# Altium PCB Rev4_FE_Test.PCBDOC (part 1 of 2)
Units mm, origin at the board's own origin, x right, y up, seen from the top; angles counter-clockwise.
Board outline 99.7 x 23.5 mm, 6 copper layers (Top Layer, Int1 (GND), Int2 (Sign), Int3 (Sign), Int4 (GND), Bottom Layer), stack 1.49 mm thick; 159 components, 78 nets, 449 pads, 301 vias.
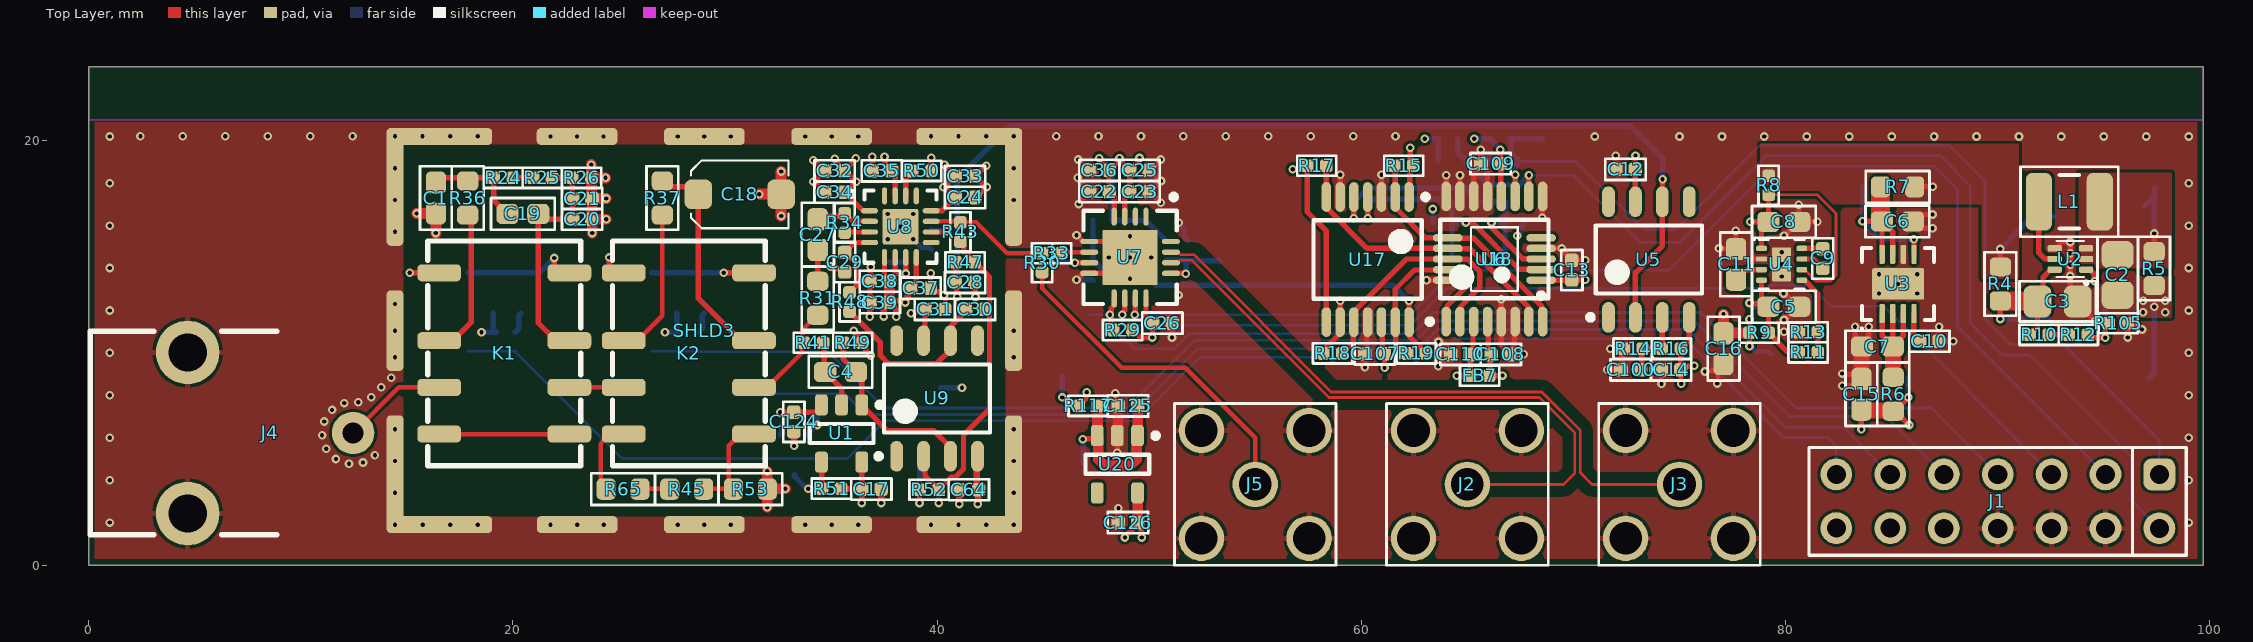
[diagram p0: Top Layer view]
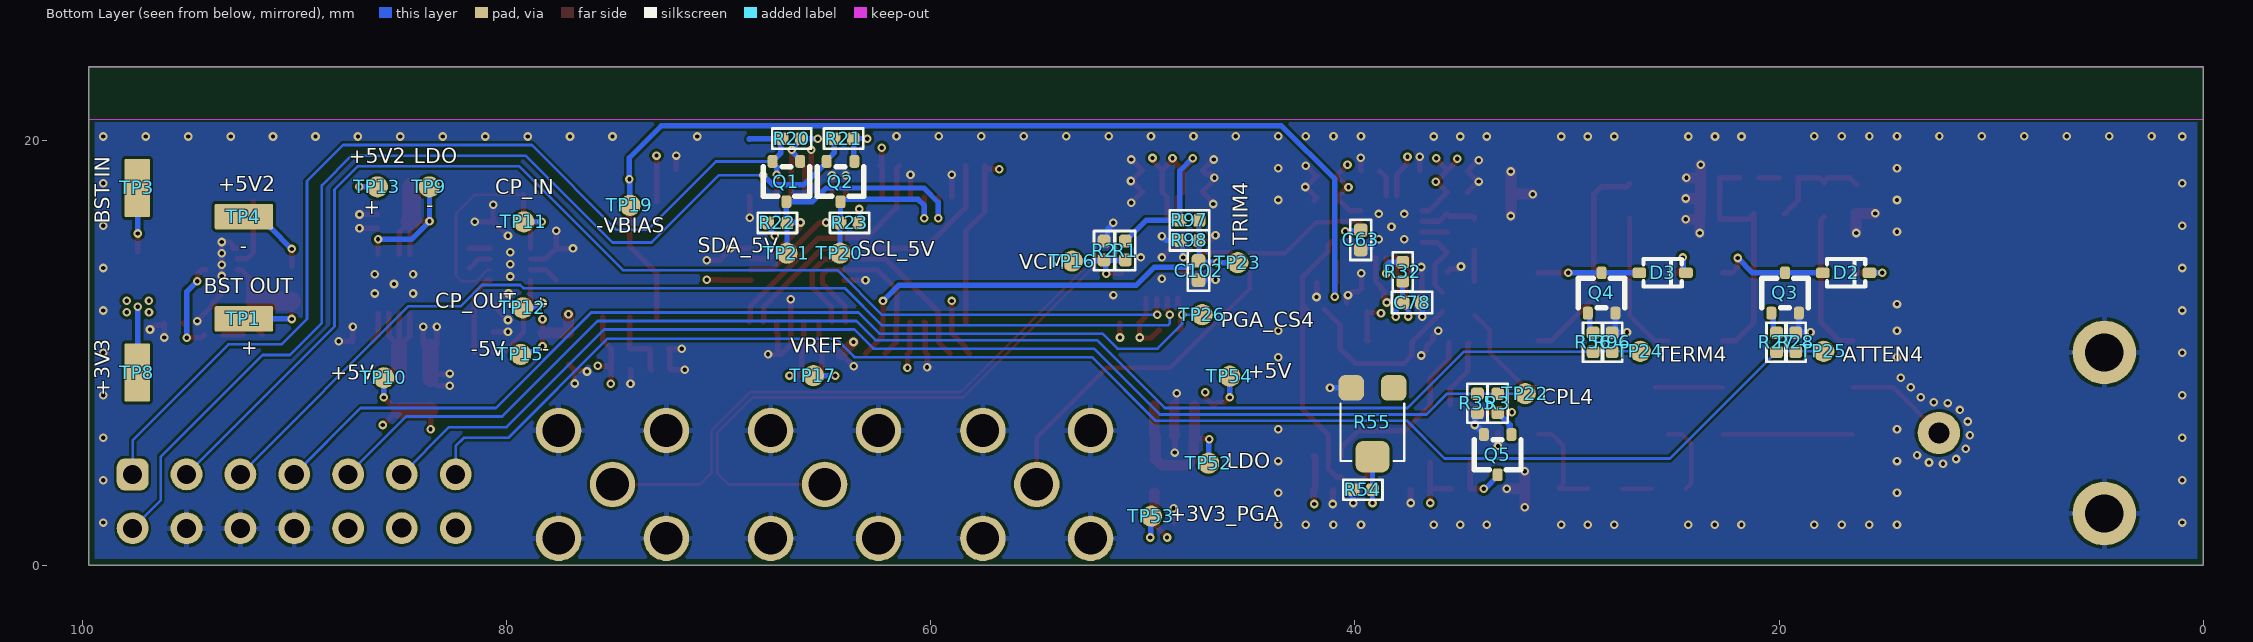
[diagram p1: Bottom Layer view, seen from below]
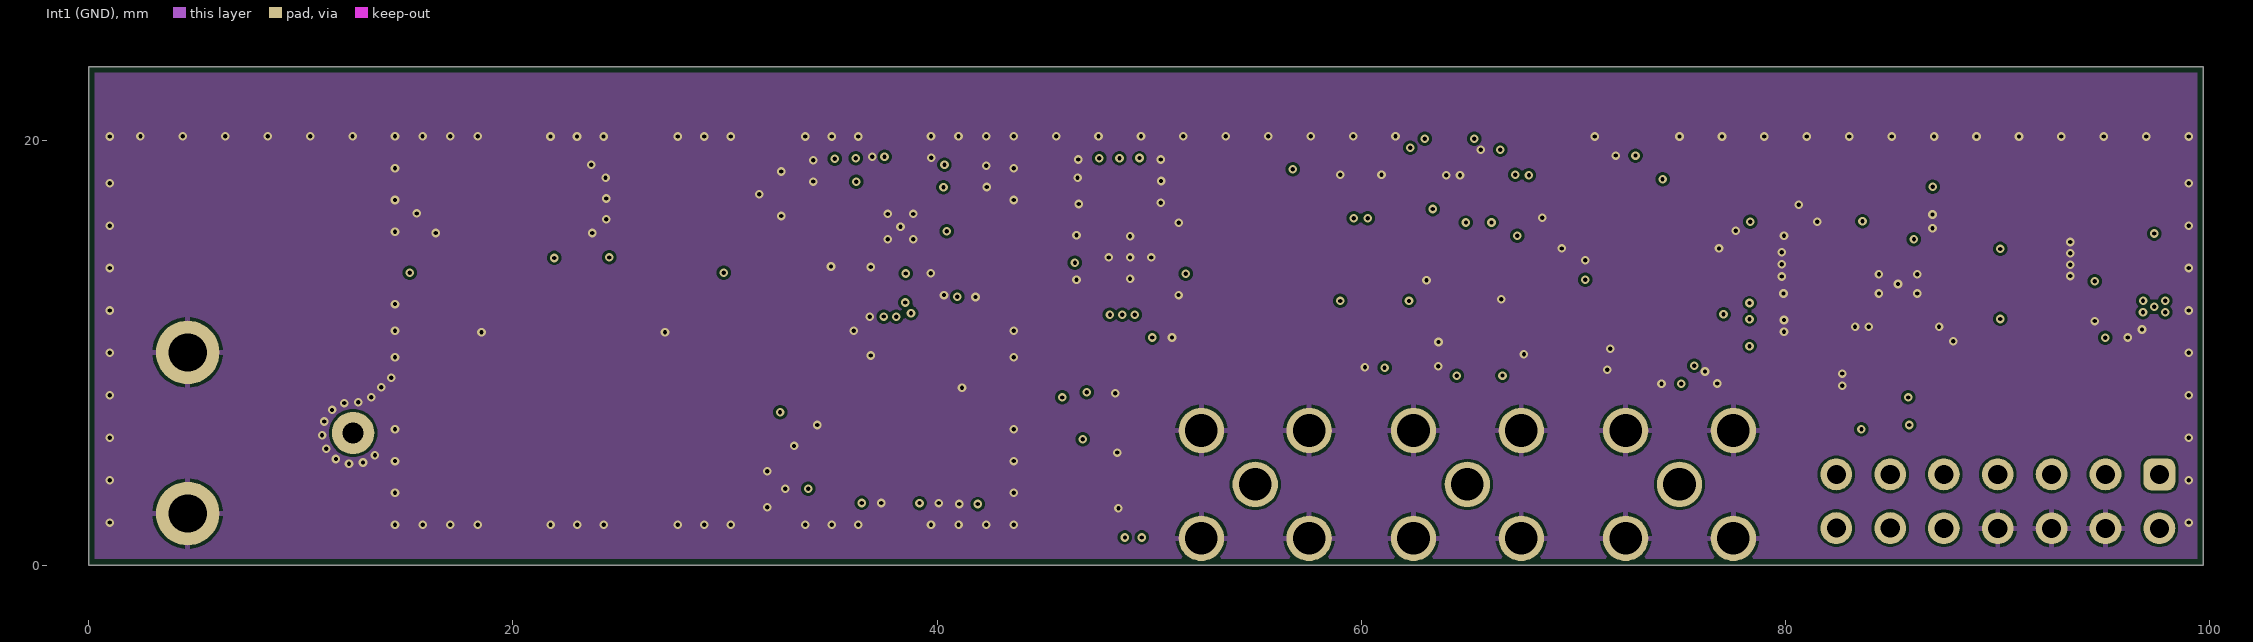
[diagram p2: Int1 (GND)]
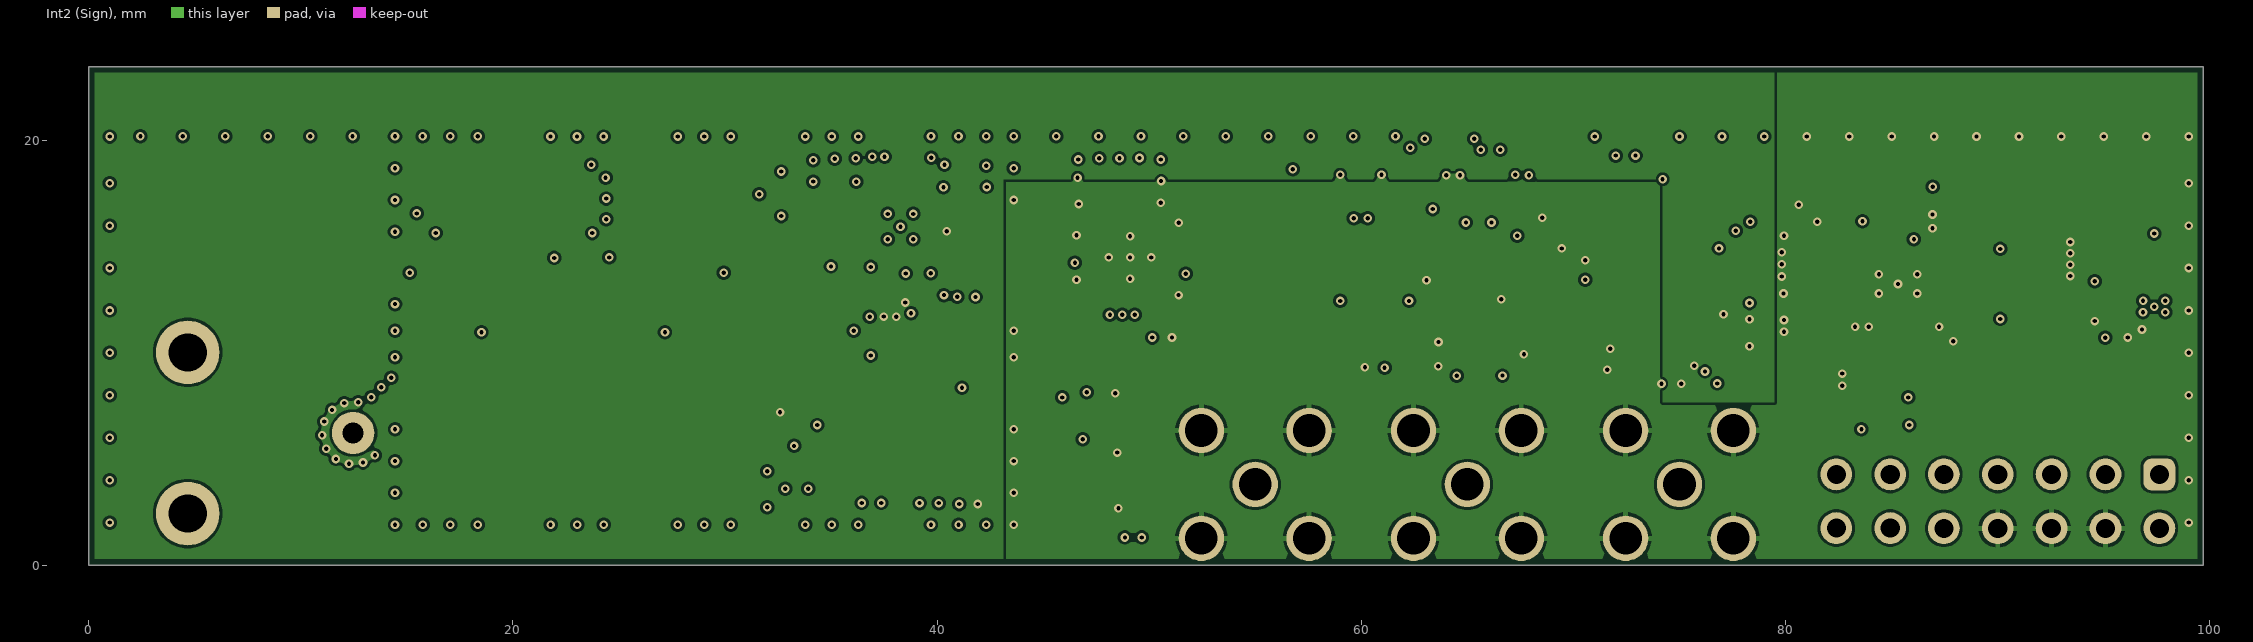
[diagram p3: Int2 (Sign)]
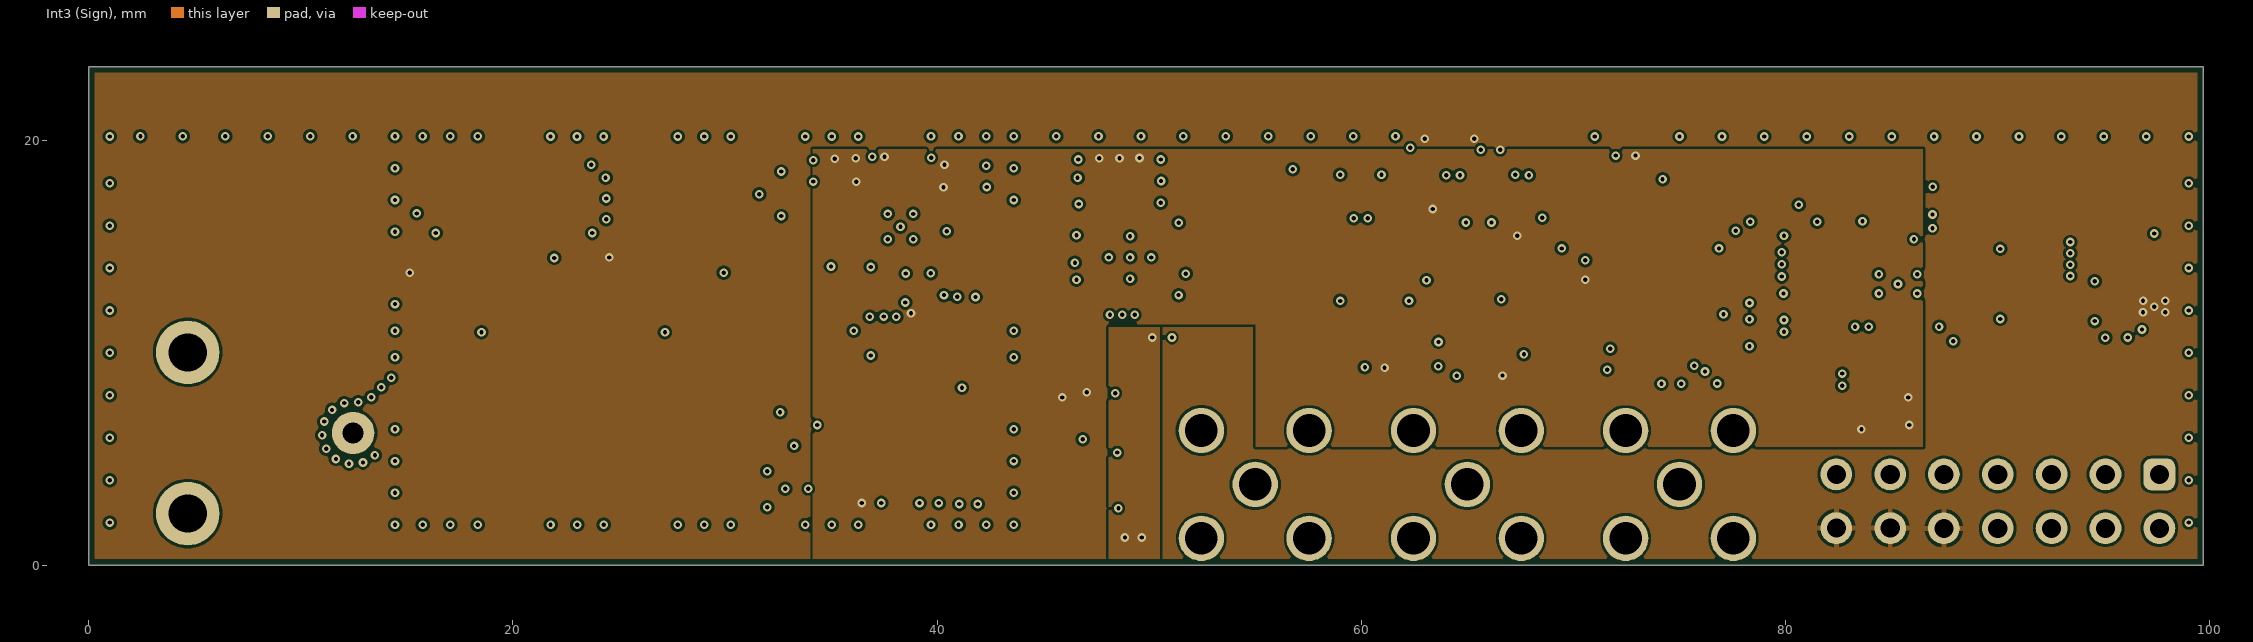
[diagram p4: Int3 (Sign)]
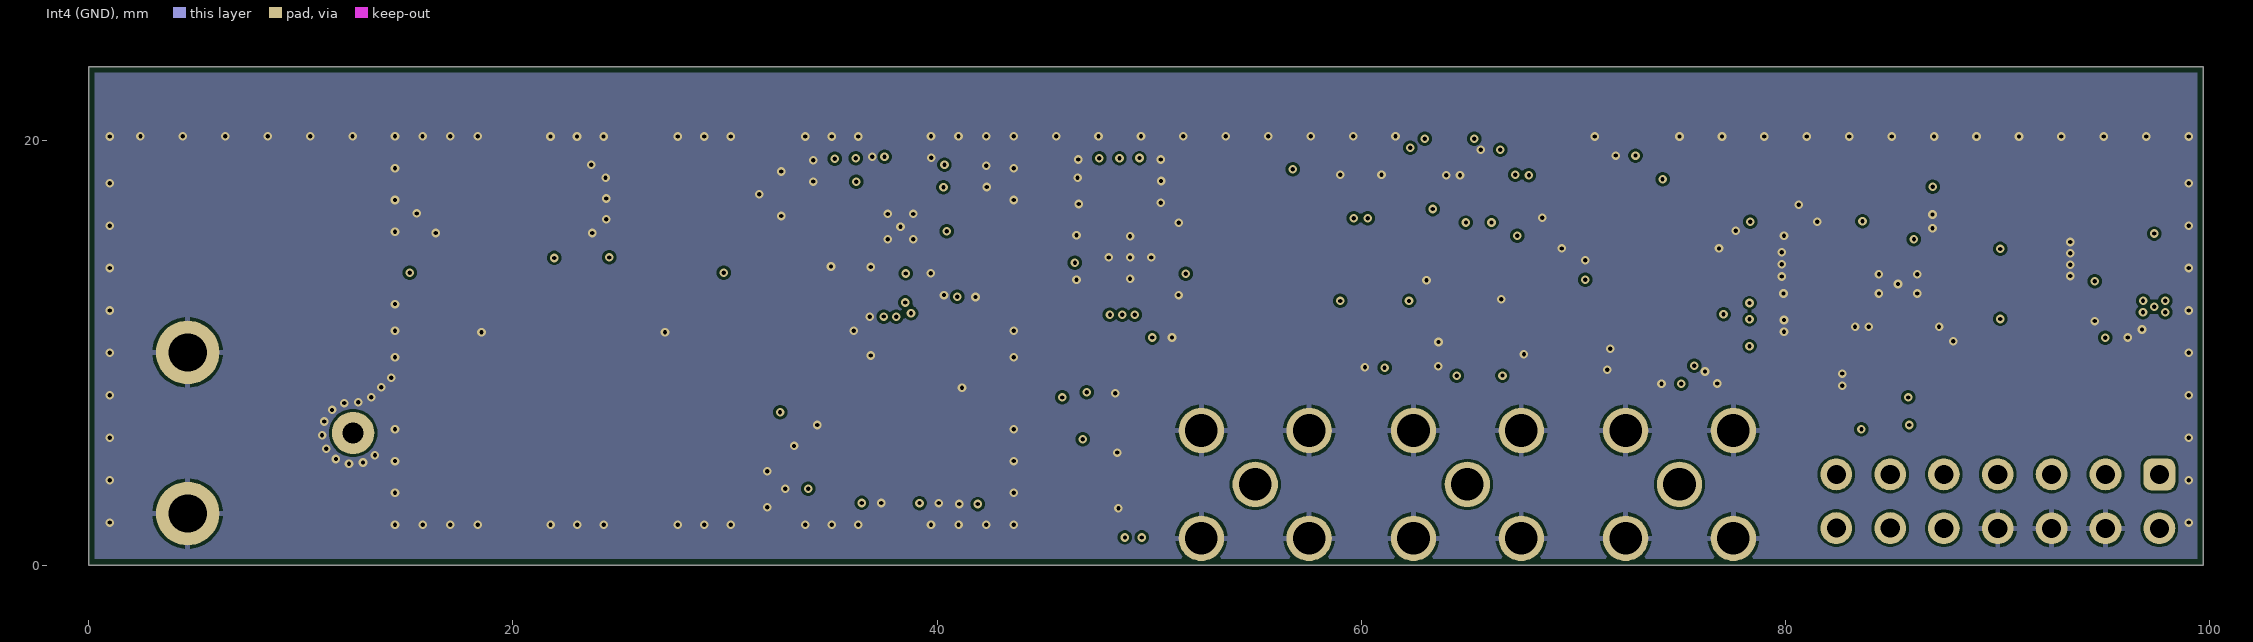
[diagram p5: Int4 (GND)]
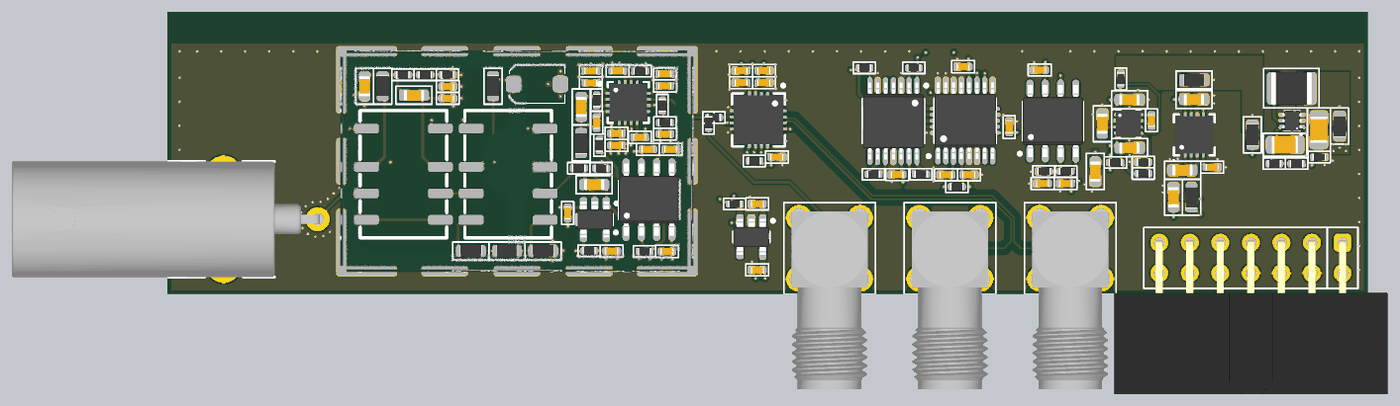
[diagram p7: 3D render of the assembled board from above, using the file's embedded part models]
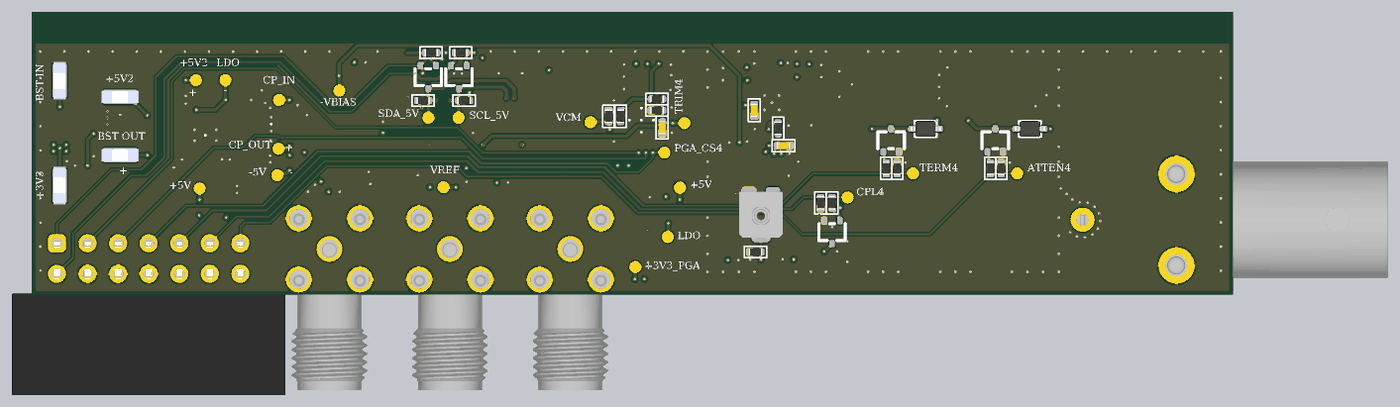
[diagram p8: 3D render of the assembled board from below, using the file's embedded part models]

## Layer stack, top to bottom
Top Solder: solder mask 0.0254, SM-001, Dk 4
Top Layer: signal copper 0.035
Dielectric 1: prepreg 0.1107, PP-006, Dk 3.23
Int1 (GND): signal copper 0.0175
Dielectric 3: core 0.1016, Core-035, Dk 3.66
Int2 (Sign): signal copper 0.0175
Dielectric 5: core 0.9256, PP-006, Dk 3.66
Int3 (Sign): signal copper 0.0175
Dielectric 6: core 0.1016, Core-035, Dk 3.66
Int4 (GND): signal copper 0.0175
Dielectric 8: prepreg 0.1107, PP-006, Dk 3.23
Bottom Layer: signal copper 0.035
Bottom Solder: solder mask 0.0254, SM-001, Dk 4

## Board outline
0,0 99.7,0 99.7,23.5 0,23.5

## Design rules (kind name [scope] priority, off if disabled: settings)
BoardOutlineClearance [All] p1: gap=0.3 ignorepadtopadclearanceinfootprint=FALSE
Clearance Clearance_Via [isVia vs isVia or isPad] p1 off: gap=0.127 ignorepadtopadclearanceinfootprint=FALSE except(0: Arc-Hole Track-Hole SMDPad-Hole THPad-Hole Via-Hole Fill-Hole Poly-Hole Region-Hole Text-Hole)
Clearance Clearance_U13 [InComponent('U13') vs InComponent('U13')] p2: gap=0.127 ignorepadtopadclearanceinfootprint=TRUE except(0: Arc-Hole Track-Hole SMDPad-Hole THPad-Hole Via-Hole Fill-Hole Poly-Hole Region-Hole Text-Hole)
Clearance Clearance_DIFF_PGA [(InDifferentialPairClass('100Z_Diff_PGA')) vs (InDifferentialPairClass('100Z_Diff_PGA'))] p3: gap=0.254 ignorepadtopadclearanceinfootprint=FALSE except(0.428: Arc-Arc Arc-Track Track-Track)
Clearance Clearance_DIFF_PCIe [(InDifferentialPairClass('PCIe')) vs (InDifferentialPairClass('PCIe'))] p4: gap=0.127 ignorepadtopadclearanceinfootprint=FALSE except(0.254: Arc-Track Track-Track)
Clearance Clearance_DIFF_ADC [(InDifferentialPairClass('100Z_Diff')) vs (InDifferentialPairClass('100Z_Diff'))] p5: gap=0.127 ignorepadtopadclearanceinfootprint=FALSE except(0.214: Arc-Arc Arc-Track Track-Track)
Clearance Clearance_DIFF_PGA_GND [(InDifferentialPairClass('100Z_Diff_PGA')) vs InNet('GND')] p6: gap=0.127 ignorepadtopadclearanceinfootprint=FALSE except(0.508: Arc-Poly Track-Poly)
Clearance Clearance_DIFF_PCIe_GND [(InDifferentialPairClass('PCIe')) vs InNet('GND')] p7: gap=0.127 ignorepadtopadclearanceinfootprint=FALSE except(0.508: Arc-Poly Track-Poly)
Clearance Clearance_DIFF_ADC_GND [(InDifferentialPairClass('100Z_Diff')) vs InNet('GND')] p8: gap=0.127 ignorepadtopadclearanceinfootprint=FALSE except(0.508: Arc-Poly Track-Poly)
Clearance Clearance_50Z [InNetClass('50Z')] p9: gap=0.127 ignorepadtopadclearanceinfootprint=FALSE except(0: Arc-Hole Track-Hole SMDPad-Hole THPad-Hole Via-Hole Fill-Hole Poly-Hole Region-Hole Text-Hole; 0.5: Arc-Fill Arc-Poly Arc-Region Track-Fill Track-Poly Track-Region SMDPad-Fill SMDPad-Poly SMDPad-Region THPad-Fill THPad-Poly THPad-Region Via-Fill Via-Poly Via-Region Fill-Fill Fill-Poly Fill-Region Poly-Poly Poly-Region Region-Region)
Clearance [All] p10: gap=0.127 ignorepadtopadclearanceinfootprint=FALSE except(0: Arc-Hole Track-Hole SMDPad-Hole THPad-Hole Via-Hole Fill-Hole Poly-Hole Region-Hole Text-Hole)
ComponentClearance ComponentClearance_BNC [HasFootprint('MOL_0731000105')] p1: gap=0 collisioncheckmode=3 verticalgap=0 showdistances=FALSE
ComponentClearance ComponentClearance_Probe_Comp [HasFootprint('GEN_2.54mm_1x2_Pin_TH_RA')] p2: gap=0 collisioncheckmode=3 verticalgap=0 showdistances=FALSE
ComponentClearance ComponentClearance_100pin [HasFootprint('SAM_LSHM-150-XX.X-XX-DV-A-S')] p3: gap=0 collisioncheckmode=3 verticalgap=0 showdistances=FALSE
ComponentClearance ComponentClearance_60pin [HasFootprint('SAM_LSHM-130-XX.X-XX-DV-A-S')] p4: gap=0 collisioncheckmode=3 verticalgap=0 showdistances=FALSE
ComponentClearance [All] p5: gap=0.254 collisioncheckmode=3 verticalgap=0.254 showdistances=FALSE
DiffPairsRouting DiffPairsRouting_100Z [InDifferentialPairClass('100Z_Diff')] p1: maxlimit=0.23 minlimit=0.127 mostfreqgap=0.23 toplayer_mingap=0.13 toplayer_maxgap=0.13 toplayer_prefgap=0.13 toplayer_minwidth=0.127 toplayer_maxwidth=0.127 toplayer_prefwidth=0.127 midlayer2_mingap=0.23 midlayer2_minwidth=0.127 midlayer2_maxwidth=0.127 midlayer2_prefwidth=0.127 midlayer3_mingap=0.23 midlayer3_minwidth=0.127 midlayer3_maxwidth=0.127 midlayer3_prefwidth=0.127 bottomlayer_mingap=0.13 bottomlayer_maxgap=0.13 bottomlayer_prefgap=0.13 bottomlayer_minwidth=0.127 bottomlayer_maxwidth=0.127 bottomlayer_prefwidth=0.127 impedanceprofiledriven=TRUE impedanceprofileid={FB5F7173-F835-4297-BE54-BE04AE4BFF60} impedanceprofilevalue=100.000000 maxuncoupledlength=12.7
DiffPairsRouting DiffPairsRouting_100Z_PGA [InDifferentialPairClass('100Z_Diff_PGA')] p2: maxlimit=0.23 minlimit=0.127 mostfreqgap=0.23 toplayer_mingap=0.13 toplayer_maxgap=0.13 toplayer_prefgap=0.13 toplayer_minwidth=0.127 toplayer_maxwidth=0.127 toplayer_prefwidth=0.127 midlayer2_mingap=0.23 midlayer2_minwidth=0.127 midlayer2_maxwidth=0.127 midlayer2_prefwidth=0.127 midlayer3_mingap=0.23 midlayer3_minwidth=0.127 midlayer3_maxwidth=0.127 midlayer3_prefwidth=0.127 bottomlayer_mingap=0.13 bottomlayer_maxgap=0.13 bottomlayer_prefgap=0.13 bottomlayer_minwidth=0.127 bottomlayer_maxwidth=0.127 bottomlayer_prefwidth=0.127 impedanceprofiledriven=TRUE impedanceprofileid={FB5F7173-F835-4297-BE54-BE04AE4BFF60} impedanceprofilevalue=100.000000 maxuncoupledlength=12.7
DiffPairsRouting DiffPairsRouting_PCIe [InDifferentialPairClass('PCIe')] p3: maxlimit=0.127 minlimit=0.127 mostfreqgap=0.127 toplayer_minwidth=0.191 toplayer_maxwidth=0.191 toplayer_prefwidth=0.191 midlayer2_minwidth=0.148 midlayer2_maxwidth=0.148 midlayer2_prefwidth=0.148 midlayer3_minwidth=0.148 midlayer3_maxwidth=0.148 midlayer3_prefwidth=0.148 bottomlayer_minwidth=0.191 bottomlayer_maxwidth=0.191 bottomlayer_prefwidth=0.191 impedanceprofiledriven=TRUE impedanceprofileid={7212ECE3-5650-4114-8E5F-257A5B36AE57} impedanceprofilevalue=85.000000 maxuncoupledlength=12.7
Height "PCI Express, Page 84, \"Component Height Constraints\" for solder side" [OnBottomLayer] p1: minheight=0 maxheight=2.67 prefheight=2.67
Height "PCI Express, Page 84, \"Component Height Constraints\" for component side" [OnTopLayer] p2: minheight=0 maxheight=14.47 prefheight=14.47
HoleSize [All] p1: absolutevalues=TRUE maxlimit=6.731 minlimit=0.254 maxpercent=80.000 minpercent=20.000
HoleToHoleClearance [All] p1: gap=0.254 allowstackedmicrovias=FALSE
MatchedLengths MatchedLengths_ADC [InDifferentialPairClass('100Z_Diff')] p1: tolerance=3 checknetsindiffpair=FALSE checkdiffpairvsdiffpair=TRUE checkxsignals=TRUE checkothers=TRUE usedelayunits=TRUE delaytolerance=5.000000
MatchedLengths MatchedLengths_ADC_pair [InDifferentialPairClass('100Z_Diff')] p2: tolerance=3 checknetsindiffpair=TRUE checkdiffpairvsdiffpair=FALSE checkxsignals=FALSE checkothers=FALSE usedelayunits=TRUE delaytolerance=2.000000
MatchedLengths MatchedLengths_PGA [InDifferentialPairClass('100Z_Diff_PGA')] p3: tolerance=3 checknetsindiffpair=FALSE checkdiffpairvsdiffpair=TRUE checkxsignals=TRUE checkothers=TRUE usedelayunits=TRUE delaytolerance=5.000000
MatchedLengths MatchedLengths_PGA_pair [InDifferentialPairClass('100Z_Diff_PGA')] p4: tolerance=3 checknetsindiffpair=TRUE checkdiffpairvsdiffpair=FALSE checkxsignals=FALSE checkothers=FALSE usedelayunits=TRUE delaytolerance=2.000000
MatchedLengths MatchedLengths_PCIe_pair [InDifferentialPairClass('PCIe')] p5: tolerance=3 checknetsindiffpair=TRUE checkdiffpairvsdiffpair=FALSE checkxsignals=FALSE checkothers=FALSE usedelayunits=TRUE delaytolerance=2.000000
MinimumAnnularRing [All] p1: minimumring=0.102
MinimumSolderMaskSliver [All] p1: minsoldermaskwidth=0
PlaneClearance [All] p1: clearance=0.127
PlaneConnect [All] p1: pad.planeconnectstyle=Relief pad.reliefexpansion=0.102 pad.reliefentries=4 pad.reliefconductorwidth=0.152 pad.reliefairgap=0.152 via.planeconnectstyle=Direct via.reliefexpansion=0.102 via.reliefentries=4 via.reliefconductorwidth=0.152 via.reliefairgap=0.152
PolygonConnect [All] p1: thpad.connectstyle=Relief thpad.reliefconductorwidth=0.254 thpad.reliefentries=4 thpad.polygonreliefangle="90 Angle" thpad.airgapwidth=0.152 smdpad.connectstyle=Direct smdpad.reliefconductorwidth=0.254 smdpad.reliefentries=4 smdpad.polygonreliefangle="90 Angle" smdpad.airgapwidth=0.152 via.connectstyle=Direct via.reliefconductorwidth=0.254 via.reliefentries=4 via.polygonreliefangle="90 Angle" via.airgapwidth=0.152
RoutingCorners [All] p1: cornerstyle=45-Degree minsetback=1.25 maxsetback=1.25
RoutingVias [All] p1: holewidth=0.254 width=0.457 viastyle="Through Hole" minholewidth=0.254 minwidth=0.457 maxholewidth=0.254 maxwidth=0.457 useviatemplates=TRUE viatemplateguid#1={14ACA18C-B4B9-4F0E-87C9-584203889310} viatemplatename#1=v41h20m0mx0
SilkToSilkClearance [All] p1: silktosilkclearance=0
SilkToSolderMaskClearance [IsPad] p1: minsilkscreentomaskgap=0.127 clearancetoexposedcopper=TRUE
SolderMaskExpansion [All] p1: expansion=0.038 istentingtop=FALSE
ViasUnderSMD [All] p1: allowed=FALSE
Width GND [InNet('GND')] p1: maxlimit=0.762 minlimit=0.127 preferedwidth=0.508
Width Power [InNetClass('Power')] p2: maxlimit=1.016 minlimit=0.508 preferedwidth=0.762
Width 3V3 [InNetClass('3V3')] p3: maxlimit=0.762 minlimit=0.254 preferedwidth=0.508
Width 50Z [InNetClass('50Z')] p4: maxlimit=0.254 minlimit=0.127 preferedwidth=0.156 toplayer_minwidth=0.213 toplayer_maxwidth=0.213 toplayer_prefwidth=0.213 midlayer2_minwidth=0.156 midlayer2_maxwidth=0.156 midlayer3_minwidth=0.156 midlayer3_maxwidth=0.156 bottomlayer_minwidth=0.213 bottomlayer_maxwidth=0.213 bottomlayer_prefwidth=0.213 impedanceprofiledriven=TRUE impedanceprofileid={FDA8FC08-28A6-4DD6-B9BB-CC1F53D11216} impedanceprofilevalue=50.000000 minimp=50.000000 maximp=50.000000 favimp=50.000000
Width [All] p5: maxlimit=10.16 minlimit=0.127 preferedwidth=0.254 midlayer3_minwidth=0.152 midlayer3_prefwidth=0.203 midlayer4_minwidth=0.152 midlayer4_prefwidth=0.203 minimp=50.000000 maximp=50.000000 favimp=50.000000
19 further rules are at their usual default settings.

## Classes and differential pairs
differential pair class 100Z_Diff_PGA: OUT_R
component class FE: C2 C3 C5 C6 C7 C8 C9 C10 C11 C12 C13 C14 C15 C16 C100 C107 C108 C109 C110 C125 C126 FB7 J1 L1 Q1 Q2 R1 R2 R4 R5 R6 R7 R8 R9 R10 R11 R12 R13 R14 R15 R16 R17 R18 R19 R20 R21 R22 R23 R105 R117 TP1 TP3 TP4 TP8 TP9 TP10 TP11 TP12 TP13 TP15 TP16 TP17 TP19 TP20 TP21 TP52 TP53 TP54 U2 U3 U4 U5 U6 U17 U18 U20
component class CH4: C1 C4 C17 C18 C19 C20 C21 C22 C23 C24 C25 C26 C27 C28 C29 C30 C31 C32 C33 C34 C35 C36 C37 C38 C39 C63 C64 C78 C102 C124 D2 D3 J2 J3 J4 J5 K1 K2 Q3 Q4 Q5 R3 R24 R25 R26 R27 R28 R29 R30 R31 R32 R33 R34 R35 R36 R37 R41 R43 R45 R47 R48 R49 R50 R51 R52 R53 R54 R55 R56 R65 R96 R97 R98 SHLD3 TP22 TP23 TP24 TP25 TP26 U1 U7 U8 U9
differential pair OUT_R: +OUT_R_P -OUT_R_N

## Components (designator, comment, footprint, x,y, rotation, side; value= is the part's Value field where it differs from the comment)
C1 "6pF" GEN_C_0603 16.375,17.3 r90 top
C2 "22uF" GEN_C_0805 95.65,13.675 r90 top
C3 "22uF" GEN_C_0805 92.825,12.425 r180 top
C4 "22nF" GEN_C_0603 35.45,9.1 r0 top
C5 "10uF" GEN_C_0603 79.916,12.176 r180 top
C6 "10uF" GEN_C_0603 85.27,16.2 r180 top
C7 "10uF" GEN_C_0603 84.325,10.3 r0 top
C8 "10uF" GEN_C_0603 79.916,16.176 r180 top
C9 "1uF" GEN_C_0402 81.75,14.45 r90 top
C10 "1nF" GEN_C_0402 86.775,10.55 r180 top
C11 "10uF" GEN_C_0603 77.666,14.176 r270 top
C12 "100nF" GEN_C_0402 72.455,18.65 r180 top
C13 "100nF" GEN_C_0402 69.925,13.9 r270 top
C14 "100nF" GEN_C_0402 74.605,9.2 r0 top
C15 "10uF" GEN_C_0603 83.575,8.05 r270 top
C16 "10uF" GEN_C_0603 77.075,10.2 r90 top
C17 "100nF" GEN_C_0402 36.9,3.575 r180 top
C18 "3-10pF" EW_TRIMCAP 30.7,17.475 r90 top
C19 "10pF" GEN_C_0603 20.475,16.55 r180 top
C20 "180pF" GEN_C_0402 23.275,16.3 r180 top
C21 "300pF" GEN_C_0402 23.275,17.275 r180 top
C22 "1nF" GEN_C_0402 47.65,17.6 r0 top
C23 "10nF" GEN_C_0402 49.55,17.6 r180 top
C24 "100nF" GEN_C_0402 41.325,17.325 r180 top
C25 "1uF" GEN_C_0402 49.55,18.6 r180 top
C26 "100nF" GEN_C_0402 50.625,11.4 r180 top
C27 "22nF" GEN_C_0603 34.375,15.575 r270 top
C28 "100nF" GEN_C_0402 41.325,13.325 r0 top
C29 "100pF" GEN_C_0402 35.65,14.275 r90 top
C30 "100pF" GEN_C_0402 41.8,12.05 r0 top
C31 "2.2uF" GEN_C_0402 39.9,12.05 r180 top
C32 "100nF" GEN_C_0402 35.175,18.575 r180 top
C33 "100nF" GEN_C_0402 41.325,18.325 r0 top
C34 "100nF" GEN_C_0402 35.175,17.575 r180 top
C35 "100nF" GEN_C_0402 37.4,18.575 r0 top
C36 "100nF" GEN_C_0402 47.65,18.6 r0 top
C37 "100nF" GEN_C_0402 39.225,13.05 r180 top
C38 "100nF" GEN_C_0402 37.3,13.375 r0 top
C39 "100nF" GEN_C_0402 37.3,12.375 r180 top
C63 "100nF" GEN_C_0402 39.725,15.325 r270 bottom
C64 "100nF" GEN_C_0402 41.5,3.55 r180 top
C78 "2.2uF" GEN_C_0402 37.3,12.375 r0 bottom
C100 "100nF" GEN_C_0402 72.7,9.2 r0 top
C102 "100nF" GEN_C_0402 47.375,13.875 r270 bottom
C107 "100nF" GEN_C_0402 60.625,9.95 r0 top
C108 "100nF" GEN_C_0402 66.575,9.925 r180 top
C109 "100nF" GEN_C_0402 66.1,18.925 r0 top
C110 "100nF" GEN_C_0402 64.675,9.925 r0 top
C124 "100nF" GEN_C_0402 33.25,6.75 r90 top
C125 "1uF" GEN_C_0402 49,7.5 r0 top
C126 "1uF" GEN_C_0402 49,2 r0 top
D2 "1N4148" GEN_SOD_323 16.85,13.775 r0 bottom
D3 "1N4148" GEN_SOD_323 25.5,13.775 r0 bottom
FB7 "120@100MHZ" GEN_R_0402 65.575,8.925 r0 top
J1 "2.54mm 2X7 Pin TH" GEN_2.54mm_2X7_Pin_TH_RA 90,3 r180 top
J2 "SMA" MOL_0733910083 65,3.8 r0 top
J3 "SMA" MOL_0733910083 75,3.8 r0 top
J4 "BNC" MOL_0731000105 8.575,6.225 r90 top locked
J5 "SMA" MOL_0733910083 55,3.8 r0 top
K1 "FTR-B3SA" FUJ_FTR-B3SA 19.6,9.975 r270 top
K2 "FTR-B3SA" FUJ_FTR-B3SA 28.3,9.975 r270 top
L1 "1uH" GEN_L_1210 93.375,17.125 r180 top
Q1 "DMN62D0UW" GEN_SOT_323 66.8,18.075 r0 bottom
Q2 "DMN62D0UW" GEN_SOT_323 64.25,18.075 r0 bottom
Q3 "DMN62D0UW" GEN_SOT_323 19.725,12.825 r180 bottom
Q4 "DMN62D0UW" GEN_SOT_323 28.375,12.825 r180 bottom
Q5 "DMN62D0UW" GEN_SOT_323 33.275,5.2 r0 bottom
R1 "4.7K" GEN_R_0402 50.825,14.825 r90 bottom
R2 "1K" GEN_R_0402 51.825,14.825 r90 bottom
R3 "10K" GEN_R_0402 33.275,7.625 r90 bottom
R4 "0.01" GEN_R_0603 90.125,13.25 r90 top
R5 "0.01" GEN_R_0603 97.375,13.975 r270 top
R6 "0.01" GEN_R_0603 85.075,8.05 r270 top
R7 "0.01" GEN_R_0603 85.28,17.825 r180 top
R8 "120@100MHZ" GEN_R_0402 79.2,17.9 r270 top
R9 "120@100MHZ" GEN_R_0402 78.75,10.95 r180 top
R10 "681K" GEN_R_0402 91.95,10.85 r180 top
R11 "309K" GEN_R_0402 81.066,10.026 r180 top
R12 "90.9k" GEN_R_0402 93.8,10.85 r180 top
R13 "100k" GEN_R_0402 81.066,10.976 r0 top
R14 "10K" GEN_R_0402 72.815,10.2 r180 top
R15 "2K" GEN_R_0402 62,18.825 r180 top
R16 "10K" GEN_R_0402 74.615,10.2 r180 top
R17 "2K" GEN_R_0402 57.9,18.825 r0 top
R18 "2K" GEN_R_0402 58.65,9.975 r0 top
R19 "2K" GEN_R_0402 62.6,9.975 r180 top
R20 "10K" GEN_R_0402 66.55,20.1 r180 bottom
R21 "10K" GEN_R_0402 64.1,20.1 r180 bottom
R22 "10K" GEN_R_0402 67.225,16.125 r0 bottom
R23 "10K" GEN_R_0402 63.825,16.125 r180 bottom
R24 "300K" GEN_R_0402 19.55,18.25 r0 top
R25 "680K" GEN_R_0402 21.4,18.25 r0 top
R26 "20k" GEN_R_0402 23.25,18.25 r180 top
R27 "10K" GEN_R_0402 20.125,10.5 r270 bottom
R28 "10K" GEN_R_0402 19.225,10.5 r270 bottom
R29 "10K" GEN_R_0402 48.75,11.075 r0 top
R30 "0" GEN_R_0402 44.95,14.25 r270 top
R31 "30" GEN_R_0603 34.375,12.575 r90 top
R32 "100k" GEN_R_0402 37.75,13.825 r270 bottom
R33 "49.9" GEN_R_0402 45.4,14.7 r0 top
R34 "909k" GEN_R_0402 35.65,16.125 r90 top
R35 "10K" GEN_R_0402 34.225,7.625 r90 bottom
R36 "30" GEN_R_0603 17.875,17.3 r90 top
R37 "30" GEN_R_0603 27.05,17.3 r90 top
R41 "909k" GEN_R_0402 34.175,10.475 r180 top
R43 "90.9k" GEN_R_0402 41.1,15.7 r90 top
R45 "30" GEN_R_0603 28.2,3.575 r0 top
R47 "90.9k" GEN_R_0402 41.325,14.275 r0 top
R48 "2K" GEN_R_0402 35.875,12.4 r270 top
R49 "90.9k" GEN_R_0402 36.025,10.475 r180 top
R50 "0" GEN_R_0402 39.275,18.575 r180 top
R51 "90.9k" GEN_R_0402 35.025,3.6 r0 top
R52 "10K" GEN_R_0402 39.625,3.55 r0 top
R53 "10" GEN_R_0603 31.2,3.575 r180 top
R54 "DNP" GEN_R_0402 39.625,3.55 r180 bottom
R55 "5K" BOU_3mm_POT 39.175,6.8 r0 bottom
R56 "10K" GEN_R_0402 28.775,10.5 r270 bottom
R65 "10" GEN_R_0603 25.2,3.575 r0 top
R96 "10K" GEN_R_0402 27.875,10.5 r270 bottom
R97 "1K" GEN_R_0402 47.8,16.25 r0 bottom
R98 "1K" GEN_R_0402 47.8,15.3 r180 bottom
R105 "100k" GEN_R_0402 95.675,11.4 r180 top
R117 "0.1" GEN_R_0402 47.125,7.5 r0 top
SHLD3 "2118728-2" TE_2118728-2 29.031,11.053 r180 top locked
TP1 "5015" KEY_5015 92.375,11.6 r0 bottom
TP3 "5015" KEY_5015 97.4,17.775 r90 bottom
TP4 "5015" KEY_5015 92.375,16.425 r0 bottom
TP8 "5015" KEY_5015 97.4,9.075 r270 bottom
TP9 "PCB" GEN_TP_PCB 83.628,17.825 r180 bottom
TP10 "PCB" GEN_TP_PCB 85.775,8.825 r90 bottom
TP11 "PCB" GEN_TP_PCB 79.175,16.175 r180 bottom
TP12 "PCB" GEN_TP_PCB 79.225,12.125 r0 bottom
TP13 "PCB" GEN_TP_PCB 86.08,17.825 r270 bottom
TP15 "PCB" GEN_TP_PCB 79.325,9.925 r180 bottom
TP16 "PCB" GEN_TP_PCB 53.325,14.325 r90 bottom
TP17 "PCB" GEN_TP_PCB 65.525,8.925 r90 bottom
TP19 "PCB" GEN_TP_PCB 74.175,16.95 r0 bottom
TP20 "PCB" GEN_TP_PCB 64.275,14.7 r90 bottom
TP21 "PCB" GEN_TP_PCB 66.775,14.7 r270 bottom
TP22 "PCB" GEN_TP_PCB 31.975,8.075 r180 bottom
TP23 "PCB" GEN_TP_PCB 45.525,14.25 r90 bottom
TP24 "PCB" GEN_TP_PCB 26.55,10.075 r0 bottom
TP25 "PCB" GEN_TP_PCB 17.9,10.075 r0 bottom
TP26 "PCB" GEN_TP_PCB 47.2,11.8 r90 bottom
TP52 "PCB" GEN_TP_PCB 46.9,4.8 r0 bottom
TP53 "PCB" GEN_TP_PCB 49.6,2.3 r0 bottom
TP54 "PCB" GEN_TP_PCB 45.9,8.9 r0 bottom
U1 "TS12A4516" GEN_SOT23_5_950_2900X1600X1450 35.5,6.2 r270 top
U2 "TPS61023" TI_SOT563_DRL0006A 93.425,14.425 r180 top
U3 "ADM7171ACPZ-5.0" AD_DFN8_CP-8-21 85.3,13.25 r90 top
U4 "LM27761" TI_WSON8_DSG0008A 79.816,14.176 r0 top
U5 "OP07CDR" TI_SOIC8_D0008A 73.555,14.4 r90 top
U6 "MCP4728" MC_MSOP10_UN 66.275,14.425 r180 top
U7 "LMH6518" TI_WQFN_RGH0016A 49.1,14.5 r270 top
U8 "BUF802" TI_VQFN_RGT0016C 38.275,15.95 r0 top
U9 "OP07CDR" TI_SOIC8_D0008A 40,7.85 r90 top
U17 "MCP4432T-503E" MC_TSSOP14 60.3,14.4 r270 top
U18 "DAC8574" TI_TSSOP16_PW0016A 66.275,14.425 r90 top
U20 "TPS7A2033" GEN_SOT23_5_950_2900X1600X1450 48.5,4.75 r270 top

## Footprints (in the part's own frame and the unit in brackets; to place one, negate y for a bottom-side part, rotate by r counter-clockwise, add the part's x,y. Pads: shape width x height; smd on the part's side, far side on the other; paste and mask are expansions set on the pad)
AD_DFN8_CP-8-21 [mm] "SON, 8-Leads, Body 3.00x3.00mm, Pitch 0.50mm, Thermal Pad 2.44x1.49mm, IPC Medium Density"
  rrect50% 0.9x0.25 smd: 1(-1.395,0.75) 2(-1.395,0.25) 3(-1.395,-0.25) 4(-1.395,-0.75) 5(1.395,-0.75) 6(1.395,-0.25) 7(1.395,0.25) 8(1.395,0.75)
  rrect10% 1.49x2.44 smd paste-0.745: 9(0,0)
  silkscreen extent -2.15,-1.7 1.7,1.75, body extent -1.55,-1.55 1.55,1.55, height 0.8
BOU_3mm_POT [mm]
  rrect50% 1.2x1.2 smd: 1(-1,-1.55) 3(1,-1.55)
  rrect50% 1.6x1.5 smd: 2(0,1.7)
  silkscreen extent -1.5,-0.8 1.5,1.9, body extent -1.8,-1.76 1.8,2.2, height 1.13
EW_TRIMCAP [mm]
  rrect50% 1.4x1.3 smd: 1(0,1.95) 2(0,-1.95)
  silkscreen extent -1.6,-2.3 1.6,2.3, body extent -1.6,-2.3 1.6,2.3, height 1.5
FUJ_FTR-B3SA [mm]
  rrect50% 0.8x2.06 smd: 1(-3.8,-3.07) 2(-0.6,-3.07) 3(1.6,-3.07) 4(3.8,-3.07) 5(3.8,3.07) 6(1.6,3.07) 7(-0.6,3.07) 8(-3.8,3.07)
  silkscreen extent -5.3,-3.6 5.3,3.6, body extent -5.43,-3.73 5.43,3.73, height 5.45
GEN_2.54mm_2X7_Pin_TH_RA [mm]
  rrect50% 1.5x1.5 hole 0.9: 1(-7.62,-1.27)
  round 1.5 hole 0.9: 2(-7.62,1.27) 3(-5.08,-1.27) 4(-5.08,1.27) 5(-2.54,-1.27) 6(-2.54,1.27) 7(0,-1.27) 8(0,1.27) 9(2.54,-1.27) 10(2.54,1.27) 11(5.068,-1.27) 12(5.068,1.258) 13(7.608,-1.27) 14(7.608,1.258)
  silkscreen extent -8.89,-2.54 8.89,2.54, body extent -11.35,-1.44 11.35,11.4, height 8.1
GEN_C_0402 [mm] "Chip Capacitor, 0402, IPC Medium Density"
  rrect50% 0.64x0.64 smd: 1(-0.46,0) 2(0.46,0)
  silkscreen extent -0.95,-0.5 0.95,0.5, body extent -0.55,-0.3 0.55,0.3, height 0.6
GEN_C_0603 [mm] "Chip Capacitor, 2-Leads, Body 1.60x0.80mm, IPC Medium Density"
  rrect50% 1.05x0.95 smd: 1(-0.725,0) 2(0.725,0)
  silkscreen extent -1.5,-0.75 1.5,0.75, body extent -0.85,-0.45 0.85,0.45, height 0.9
GEN_C_0805 [mm] "Chip Capacitor, 2-Leads, Body 2.00x1.25mm, IPC Medium Density"
  rrect50% 1.3x1.5 smd: 1(-0.95,0) 2(0.95,0)
  silkscreen extent -1.8,-0.95 1.8,0.95, body extent -1.1,-0.72 1.1,0.72, height 1.45
GEN_L_1210 [mm] "Chip Inductor, 2-Leads, Body 3.20x2.50mm, IPC Medium Density"
  rrect50% 1.23x2.72 smd: 1(-1.435,0) 2(1.435,0)
  silkscreen extent -2.3,-1.65 2.3,1.65, body extent -1.7,-1.35 1.7,1.35, height 1.2
GEN_R_0402 [mm] "Chip Resistor, 2-Leads, Body 1.00x0.50mm, IPC Medium Density"
  rrect50% 0.6x0.6 smd: 1(-0.45,0) 2(0.45,0)
  silkscreen extent -0.92,-0.48 0.92,0.48, body extent -0.55,-0.3 0.55,0.3, height 0.4
GEN_R_0603 [mm]
  rrect50% 0.9x1 smd: 1(-0.8,0) 2(0.8,0)
  silkscreen extent -1.5,-0.75 1.5,0.75, body extent -0.9,-0.5 0.9,0.5, height 0.6
GEN_SOD_323 [mm]
  rrect50% 0.65x0.5 smd: 1(-1.1,0) 2(1.1,0)
  silkscreen extent -0.9,-0.65 0.9,0.65, body extent -1.26,-0.65 1.26,0.65, height 1.1
GEN_SOT23_5_950_2900X1600X1450 [mm] "SOT23, 5-Leads, Body 2.90x2.80mm, Pitch 0.95mm, IPC Medium Density"
  rrect50% 1x0.6 smd: 1(-1.35,0.95) 2(-1.35,0) 3(-1.35,-0.95) 4(1.35,-0.95) 5(1.35,0.95)
  silkscreen extent -1.47,-1.5 0.45,1.93, body extent -1.5,-1.5 1.5,1.5, height 1.45
GEN_SOT_323 [mm]
  rrect50% 0.47x0.6 smd: 1(0,0.95) 2(-0.65,-0.95) 3(0.65,-0.95)
  silkscreen extent -1.1,-0.7 1.1,0.7, body extent -1.23,-0.83 1.23,0.83, height 1.1
GEN_TP_PCB [mm]
  round 1 smd paste-1: 1(0,0)
KEY_5015 [mm] "PC TEST POINT MICRO MINIATURE"
  rrect10% 2.75x1.2 smd: 1(0,0)
  body extent -1.56,-0.51 1.56,0.51, height 1.52
MC_MSOP10_UN [mm] "TSSOP, 10-Leads, Body 3.00x3.00mm, Pitch 0.50mm, IPC Medium Density"
  oval 1.4x0.35 smd: 1(-2.2,1) 2(-2.2,0.5) 3(-2.2,0) 4(-2.2,-0.5) 5(-2.2,-1) 6(2.2,-1) 7(2.2,-0.5) 8(2.2,0) 9(2.2,0.5) 10(2.2,1)
  silkscreen extent -2.33,-1.5 1.1,1.85, body extent -2.45,-1.5 2.45,1.5, height 1.1
MC_TSSOP14 [mm] "TSOP, 14-Leads, Body 5.00x4.40mm, Pitch 0.65mm, IPC Medium Density"
  oval 1.4x0.45 smd: 1(-2.95,1.95) 2(-2.95,1.3) 3(-2.95,0.65) 4(-2.95,0) 5(-2.95,-0.65) 6(-2.95,-1.3) 7(-2.95,-1.95) 8(2.95,-1.95) 9(2.95,-1.3) 10(2.95,-0.65) 11(2.95,0) 12(2.95,0.65) 13(2.95,1.3) 14(2.95,1.95)
  silkscreen extent -3.07,-2.55 1.85,2.85, body extent -3.2,-2.55 3.2,2.55, height 1.2
MOL_0731000105 [mm] "Molex BNC Jack, TH Right Angle"
  round 2 hole 1: 1(0,-3.9)
  round 3 hole 1.8: 2(-3.8,3.9) 2(3.8,3.9)
  silkscreen extent -4.8,-0.3 4.8,8.5, body extent -4.83,-4.08 4.83,21.47, height 9.14
MOL_0733910083 [mm]
  round 2.14 hole 1.54: 1(0,0) 2(-2.54,-2.54) 2(-2.54,2.54) 2(2.54,-2.54) 2(2.54,2.54)
  silkscreen extent -3.81,-3.81 3.81,3.81, body extent -3.17,-11.71 3.17,3.09, height 10
TE_2118728-2 [mm]
  rrect50% 0.8x5.55 smd: 1(-14.581,6.772) 1(-14.579,-6.772) 1(14.579,6.772) 1(14.581,-6.772)
  rrect50% 0.8x3.8 smd: 1(-14.579,0.003) 1(14.581,0.003)
  rrect50% 4.98x0.8 smd: 1(-12.491,9.147) 1(-12.489,-9.147) 1(12.489,9.147) 1(12.491,-9.147)
  rrect50% 3.8x0.8 smd: 1(-6.001,9.147) 1(-5.999,-9.147) 1(-0.001,9.147) 1(0.001,-9.147) 1(5.999,9.147) 1(6.001,-9.147)
  body extent -14.68,-9.25 14.68,9.25, height 7
TI_SOIC8_D0008A [mm] "SOIC, 8-Leads, Body 4.91x3.90mm, Pitch 1.27mm, Height 1.75mm, IPC Medium Density"
  oval 1.45x0.6 smd: 1(-2.725,1.905) 2(-2.725,0.635) 3(-2.725,-0.635) 4(-2.725,-1.905) 5(2.725,-1.905) 6(2.725,-0.635) 7(2.725,0.635) 8(2.725,1.905)
  silkscreen extent -2.85,-2.5 1.6,2.88, body extent -3,-2.5 3,2.5, height 1.75
TI_SOT563_DRL0006A [mm] "SOTFL, 6-Leads, Body 1.60x1.60mm, Pitch 0.50mm, IPC Medium Density"
  rrect50% 0.67x0.3 smd: 1(-0.74,0.5) 2(-0.74,0) 3(-0.74,-0.5) 4(0.74,-0.5) 5(0.74,0) 6(0.74,0.5)
  silkscreen extent -0.83,-0.85 0.65,1.2, body extent -0.8,-0.85 0.8,0.85, height 0.6
TI_TSSOP16_PW0016A [mm] "TSOP, 16-Leads, Body 5.00x4.40mm, Pitch 0.65mm, IPC Medium Density"
  oval 1.4x0.45 smd: 1(-2.95,2.275) 2(-2.95,1.625) 3(-2.95,0.975) 4(-2.95,0.325) 5(-2.95,-0.325) 6(-2.95,-0.975) 7(-2.95,-1.625) 8(-2.95,-2.275) 9(2.95,-2.275) 10(2.95,-1.625) 11(2.95,-0.975) 12(2.95,-0.325) 13(2.95,0.325) 14(2.95,0.975) 15(2.95,1.625) 16(2.95,2.275)
  silkscreen extent -3.07,-2.55 1.85,3.17, body extent -3.2,-2.55 3.2,2.55, height 1.2
TI_VQFN_RGT0016C [mm] "QFN, 16-Leads, Body 3.00x3.00mm, Pitch 0.50mm, Thermal Pad 1.68x1.68mm, IPC Medium Density"
  oval 0.8x0.25 smd: 1(-1.45,0.75) 2(-1.45,0.25) 3(-1.45,-0.25) 4(-1.45,-0.75) 9(1.45,-0.75) 10(1.45,-0.25) 11(1.45,0.25) 12(1.45,0.75)
  oval 0.25x0.8 smd: 5(-0.75,-1.45) 6(-0.25,-1.45) 7(0.25,-1.45) 8(0.75,-1.45) 13(0.75,1.45) 14(0.25,1.45) 15(-0.25,1.45) 16(-0.75,1.45)
  rrect10% 1.68x1.68 smd paste-0.1: 17(0,0)
  silkscreen extent -2.47,-1.7 1.7,1.7, body extent -1.55,-1.55 1.55,1.55, height 1
TI_WQFN_RGH0016A [mm] "QFN, 16-Leads, Body 4.00x4.00mm, Pitch 0.50mm, Thermal Pad 2.60x2.60mm, IPC Medium Density"
  oval 0.85x0.25 smd: 1(-1.925,0.75) 2(-1.925,0.25) 3(-1.925,-0.25) 4(-1.925,-0.75) 9(1.925,-0.75) 10(1.925,-0.25) 11(1.925,0.25) 12(1.925,0.75)
  oval 0.25x0.85 smd: 5(-0.75,-1.925) 6(-0.25,-1.925) 7(0.25,-1.925) 8(0.75,-1.925) 13(0.75,1.925) 14(0.25,1.925) 15(-0.25,1.925) 16(-0.75,1.925)
  rrect5% 2.6x2.6 smd paste-1.3: 17(0,0)
  silkscreen extent -2.97,-2.2 2.2,2.2, body extent -2.05,-2.05 2.05,2.05, height 0.8
TI_WSON8_DSG0008A [mm] "SON, 8-Leads, Body 2.00x2.00mm, Pitch 0.50mm, Thermal Pad 1.60x0.69mm, IPC Medium Density"
  rrect50% 0.5x0.25 smd: 1(-0.95,0.75) 2(-0.95,0.25) 3(-0.95,-0.25) 4(-0.95,-0.75) 5(0.95,-0.75) 6(0.95,-0.25) 7(0.95,0.25) 8(0.95,0.75)
  rrect10% 0.9x1.6 smd paste-0.9: 9(0,0)
  silkscreen extent -1.35,-1.2 1.05,1.25, body extent -1.05,-1.05 1.05,1.05, height 0.8

## Part data
C1: library part "CAP 6pF 250V C0G 0603", Manufacturer=KEMET, Manufacturer Part Number=CBR06C609BAGAC, Package=0603, Supplier Part Number 1=399-8734-1-ND, Voltage Rating=250V, Supplier 1=Digi-Key
C2 C3: library part "CAP 22uF 25V X5R 0805", Package=0805, Supplier Part Number 1=490-10749-1-ND, Voltage Rating=25V, Supplier 1=Digi-Key
C4 C27: library part "CAP 22nF 100V X7R 0603", Package=0603, Supplier Part Number 1=490-4782-1-ND, Voltage Rating=100V, Supplier 1=Digi-Key
C5 C6 C7 C8 C11 C15 C16: library part "CAP 10uF 10V X5R 0603", Package=0402, Supplier Part Number 1=490-10474-1-ND, Voltage Rating=10V, Supplier 1=Digi-Key
C9 C25 C125 C126: library part "CAP 1uF 25V X5R 0402", Package=0402, Supplier Part Number 1=490-10017-1-ND, Voltage Rating=25V, Supplier 1=Digi-Key
C10 C22: library part "CAP 1nF 50V C0G 0402", Package=0402, Supplier Part Number 1=490-6189-1-ND, Voltage Rating=50V, Supplier 1=Digi-Key
C12 C13 C14 C17 C24 C26 C28 C32 C33 C34 C35 C36 C37 C38 C39 C63 C64 C100 C102 C107 C108 C109 C110 C124: library part "CAP 100nF 16V X7R 0402", Package=0402, Supplier Part Number 1=490-4759-1-ND, Voltage Rating=16V, Supplier 1=Digi-Key
C18: library part "CAP TRIMMER 3-10PF 100V SMD", Manufacturer=Panasonic, Manufacturer Part Number=SGC3S100, Supplier Part Number 1=2447-SGC3S100CT-ND, Supplier 1=Digi-Key
C19: library part "CAP 10pF 100V C0G 0603", Package=0603, Supplier Part Number 1=478-5769-1-ND, Voltage Rating=100V, Supplier 1=Digi-Key
C20: library part "CAP 180pF 50V C0G 0402", Manufacturer=Murata, Manufacturer Part Number=GCM1555C1H301FA16D, Package=0402, Supplier Part Number 1=490-16455-1-ND, Temperature Coefficient=C0G, Voltage Rating=50V, Supplier 1=Digi-Key
C21: library part "CAP 300pF 50V C0G 0402", Package=0402, Supplier Part Number 1=490-GCM1555C1H301FA16DCT-ND, Temperature Coefficient=C0G, Voltage Rating=50V, Supplier 1=Digi-Key
C23: library part "CAP 10nF 50V X7R 0402", Package=0402, Supplier Part Number 1=490-6351-1-ND, Voltage Rating=50V, Supplier 1=Digi-Key
C29 C30: library part "CAP 100pF 50V C0G 0402", Package=0402, Supplier Part Number 1=490-14349-1-ND, Temperature Coefficient=C0G, Voltage Rating=50V, Supplier 1=Digi-Key
C31 C78: library part "CAP 2.2uF 10V X5R 0402", Package=0402, Supplier Part Number 1=587-3153-1-ND, Voltage Rating=10V, Supplier 1=Digi-Key
D2 D3: library part "DIODE 1N4148", Max Current=150mA, Max Reverse Voltage=75V, Supplier Part Number 1=1N4148WS-FDICT-ND, Supplier 1=Digi-Key
FB7: library part "FERRITE BEAD 120 OHM 0402", Supplier Part Number 1=490-9656-1-ND, Supplier 1=Digi-Key
J1: library part "CONN 2.54mm 2X7 Pin TH RA", Supplier Part Number 1=S9203-ND, Supplier 1=Digi-Key
J2 J3 J5: library part "SMA JACK R/A", Manufacturer=Molex, Manufacturer Part Number=73100-0105, Supplier Part Number 1=WM26450-ND, Supplier 1=Digi-Key
J4: library part "BNC JACK R/A", Supplier Part Number 1=WM5524-ND, Supplier 1=Digi-Key
K1 K2: library part "RELAY DPDT-NO FTR-B3SA", Supplier Part Number 1=817-FTR-B3SA003Z, Supplier 1=Mouser
L1: library part "IND 1uH 3.1A 45 MOHM 1210", Supplier Part Number 1=490-10590-1-ND, Supplier 1=Digi-Key
Q1 Q2 Q3 Q4 Q5: library part "NMOS DMN62D0UW", Max Power=320mW, Supplier Part Number 1=DMN62D0UW-7DICT-ND, Id=340mA, Supplier 1=Digi-Key, Vdss=60V
R1: library part "RES 4.7K OHM 1% 1/10W 0402", Manufacturer=Panasonic, Manufacturer Part Number=ERJ-2RKF4701X, Package=0402, Supplier Part Number 1=P4.70KLCT-ND, Tolerance=1%, Supplier 1=Digi-Key
R2: library part "RES 1K OHM 1% 1/10W 0402", House Part Number=R-1K-0402-1%-001, Manufacturer=Yageo, Manufacturer Part Number=RC0402FR-071KL, Package=0402, Supplier Part Number 1=311-1.00KLRCT-ND, Tolerance=1%, Supplier 1=Digi-Key
R3 R14 R16 R20 R21 R22 R23 R27 R28 R29 R52 R56 R96: library part "RES 10K OHM 1% 1/10W 0402", Package=0402, Power Rating=0.1W, Supplier Part Number 1=P10.0KLCT-ND, Tolerance=1%, Supplier 1=Digi-Key
R4 R5 R6 R7: library part "RES 0.01 OHM 1% 1/4W 0603", Package=0603, Power Rating=0.25W, Supplier Part Number 1=408-1404-1-ND, Tolerance=1%, Supplier 1=Digi-Key
R8 R9: library part "FERRITE BEAD 120 OHM 0402", House Part Number=BLM15PX121SN1D, Manufacturer=Murata, Supplier Part Number 1=490-9656-1-ND, Manufacturer Part Number=BLM15PX121SN1D, Supplier 1=Digi-Key
R10: library part "RES 681K OHM 1% 1/16W 0402", Package=0402, Power Rating=0.0625W, Supplier Part Number 1=YAG3212CT-ND, Tolerance=1%, Supplier 1=Digi-Key
R11: library part "RES 309K OHM 1% 1/16W 0402", Package=0402, Power Rating=0.0625W, Supplier Part Number 1=YAG3108CT-ND, Tolerance=1%, Supplier 1=Digi-Key
R12 R43 R47 R49 R51: library part "RES 90.9K OHM 1% 1/16W 0402", Package=0402, Power Rating=0.0625W, Supplier Part Number 1=311-90.9KLRCT-ND, Tolerance=1%, Supplier 1=Digi-Key
R13 R32 R105: library part "RES 100K OHM 1% 1/10W 0402", Package=0402, Power Rating=0.1W, Supplier Part Number 1=311-100KLRCT-ND, Tolerance=1%, Supplier 1=Digi-Key
R15 R17 R18 R19 R48: library part "RES 2K OHM 1% 1/16W 0402", Package=0402, Power Rating=0.0625W, Supplier Part Number 1=311-2KLRCT-ND, Tolerance=1%, Supplier 1=Digi-Key
R24: library part "RES 300K OHM 1% 1/10W 0402", Manufacturer=Panasonic, Manufacturer Part Number=ERJ-2RKF3003X, Package=0402, Supplier Part Number 1=P300KLCT-ND, Tolerance=1%, Supplier 1=Digi-Key
R25: library part "RES 680K OHM 1% 1/16W 0402", Manufacturer=Yageo, Manufacturer Part Number=RC0402FR-07681KL, Package=0402, Supplier Part Number 1=YAG3211CT-ND, Tolerance=1%, Supplier 1=Digi-Key
R26: library part "RES 20K OHM 1% 1/16W 0402", Manufacturer=Yageo, Manufacturer Part Number=RC0402FR-0720KL, Package=0402, Supplier Part Number 1=311-20.0KLRCT-ND, Tolerance=1%, Supplier 1=Digi-Key
R30: library part "RES 0 OHM 1/16W 0402", Manufacturer=Yageo, Manufacturer Part Number=RC0402JR-070RL, Package=0402, Supplier Part Number 1=311-0.0JRCT-ND, Supplier 1=Digi-Key
R31: library part "RES 30 OHM 1% 1/3W 0603", Manufacturer="KOA Speer", Manufacturer Part Number=SG73P1JTTD30R0F, Package=0603, Supplier Part Number 1=2019-SG73P1JTTD30R0FCT-ND, Tolerance=1%, Supplier 1=Digi-Key
R33: library part "RES 49.9 OHM 1% 1/10W 0402", Manufacturer=Yageo, Manufacturer Part Number=RC0402FR-0749R9L, Package=0402, Supplier Part Number 1=311-49.9LRCT-ND, Tolerance=1%, Supplier 1=Digi-Key
R34 R41: library part "RES 909K OHM 1% 1/16W 0402", Package=0402, Power Rating=0.0625W, Supplier Part Number 1=YAG2377CT-ND, Tolerance=1%, Supplier 1=Digi-Key
R35: library part "RES 10K OHM 1% 1/10W 0402", Manufacturer=Panasonic, Manufacturer Part Number=ERJ-2RKF1002X, Package=0402, Supplier Part Number 1=P10.0KLCT-ND, Tolerance=1%, Supplier 1=Digi-Key
R36 R37 R45: library part "RES 30 OHM 1% 1/3W 0603", Package=0603, Power Rating=0.33W, Supplier Part Number 1=2019-SG73P1JTTD30R0FCT-ND, Tolerance=1%, Supplier 1=Digi-Key
R50: library part "RES 0 OHM 1/16W 0402", Package=0402, Power Rating=0.0625W, Supplier Part Number 1=311-0.0JRCT-ND, Supplier 1=Digi-Key
R53 R65: library part "RES 10 OHM 1% 1/3W 0603", Package=0603, Power Rating=0.33W, Supplier Part Number 1=2019-SG73P1JTTD10R0FCT-ND, Tolerance=1%, Supplier 1=Digi-Key
R54: library part "RES DNP 0402", Package=0402, Power Rating=0.0625W, Tolerance=1%
R55: library part "TRIMMER 5K OHM 0.1W J LEAD TOP", Power Rating=0.1W, Supplier Part Number 1=TC33X-502ECT-ND, Tolerance=1%, Supplier 1=Digi-Key
R97 R98: library part "RES 1K OHM 1% 1/10W 0402", Package=0402, Power Rating=0.1W, Supplier Part Number 1=311-1.00KLRCT-ND, Tolerance=1%, Supplier 1=Digi-Key
R117: library part "RES 0.1 OHM 1% 1/6W 0402", Package=0402, Power Rating=0.16W, Supplier Part Number 1=P.10AKCT-ND, Tolerance=1%, Supplier 1=Digi-Key
SHLD3: library part "SHIELD 2118728-2", Supplier Part Number 1=A126158CT-ND, Supplier 1=Digi-Key
TP1 TP3 TP4 TP8: library part "TP KEYSTONE 5015", Supplier Part Number 1=36-5015CT-ND, Supplier 1=Digi-Key
TP9 TP10 TP11 TP12 TP13 TP15 TP16 TP17 TP19 TP20 TP21 TP22 TP23 TP24 TP25 TP26 TP52 TP53 TP54: library part "TP PCB 1mm"
U1: library part "IC SWITCH SPST TS12A4516DBVR", Manufacturer="Texas Instruments", Manufacturer Part Number=TS12A4516DBVR, Supplier Part Number 1=296-24269-1-ND, Supplier 1=Digi-Key
U2: library part "IC BOOST TPS61023", Supplier Part Number 1=296-TPS61023DRLTCT-ND, Supplier 1=Digi-Key
U3: library part "IC LDO ADM7171ACPZ-5.0", Supplier Part Number 1=505-ADM7171ACPZ-5.0-R7CT-ND, Supplier 1=Digi-Key
U4: library part "IC CPUMP LM27761", Supplier Part Number 1=296-44379-1-ND, Supplier 1=Digi-Key
U5 U9: library part "IC OPAMP OP07CDR", Supplier Part Number 1=296-14626-1-ND, Supplier 1=Digi-Key
U6: library part "IC DAC QUAD MCP4728", Supplier Part Number 1=MCP4728A1T-E/UNCT-ND, Supplier 1=Digi-Key
U7: library part "IC PGA LMH6518", Supplier Part Number 1=LMH6518SQE/NOPBCT-ND, Supplier 1=Digi-Key
U8: library part "IC BUFFER AMP BUF802", Supplier Part Number 1=595-BUF802IRGTR, Supplier 1=Mouser
U17: library part "IC DIGIPOT QUAD MCP4432T-503E", Supplier Part Number 1=579-MCP4432T-503E/ST, Supplier 1=Mouser
U18: library part "IC DAC QUAD DAC8574", Supplier Part Number 1=DAC8574IPWR, Supplier 1="Texas Instruments"
U20: library part "IC LDO TPS7A2033", Manufacturer="Texas Instruments", Manufacturer Part Number=TPS7A2033PDBVR, Supplier Part Number 1=595-TPS7A2033PDBVR, Supplier 1=Mouser

## Via types
v1: diameter 0.406, hole 0.203, Top Layer to Bottom Layer, tented both sides, 301 vias

## Nets (pads, with @x,y where several pads share a name; then routed paths per layer and width w, separated by ;. In a path a pad name is that pad's centre, name@x,y a point inside that pad or via, vN(x,y) a via of type N, cw(c..) or ccw(c..) an arc to the next point about the centre after c; other vN are vias at no path point)
+3V3: C109.2 D2.1 D3.1 J1.10 J1.12 J1.14 K1.1 K2.1 Q1.2 Q2.2 R5.2 R20.2 R21.2 TP8.1 U18.12 | length 13.6
  Top Layer w0.254: v1(15.15,13.775) K1.1@16.53,13.775 ; v1(24.55,14.5) 24.55,14.042 24.817,13.775 K2.1@25.23,13.775 ; v1(66.55,19.575) 66.555,19.57 66.555,18.93 C109.2@66.56,18.925 66.58,18.905 66.58,17.395 U18.12@66.6,17.375
  Bottom Layer w0.254: v1(15.15,13.775) D2.1@15.795,13.775 ; D3.1@24.445,13.775 24.521,13.851 24.521,14.471 v1(24.55,14.5) ; v1@63,20.104 R21.2@63.624,20.104 ; Q2.2@63.6,19.025 63.625,19.05 63.625,20.075 R21.2@63.65,20.1 ; v1(65.325,20.1) R20.2@66.1,20.1 66.1,20.088 66.521,19.667 66.521,19.604 v1(66.55,19.575) 66.521,19.546 66.521,19.461 66.15,19.09 Q1.2@66.095,19.09 ; TP8.1@97.145,8.82 TP8.1@97.4,9.075 97.375,9.1 v1(97.375,12.175)
  other v1: 96.847,11.92 97.9,11.92 96.852,12.453 97.898,12.453 62.994,20.099
+3V3_PGA: C26.2 C126.2 R29.2 TP53.1 U7.12 U20.5 | length 7.2
  Top Layer w0.254: v1(48.856,1.3) 48.856,1.341 49.287,1.772 49.287,1.827 C126.2@49.46,2 49.621,1.839 49.621,1.329 v1(49.65,1.3) ; R29.2@49.225,11.075 49.237,11.075 49.612,10.7 50.125,10.7 v1(50.15,10.725) 50.158,10.733 50.158,11.393 C26.2@50.165,11.4 50.165,11.418 49.85,11.733 U7.12@49.85,12.575
  Top Layer w0.5: U20.5@49.45,3.4 49.455,3.395 49.455,2.005 C126.2@49.46,2
  Bottom Layer w0.254: TP53.1@49.6,2.3 49.625,2.275 49.625,1.325 v1(49.65,1.3)